# Altium PCB PCB.PcbDoc
Units mm, origin at the board's own origin, x right, y up, seen from the top; angles counter-clockwise.
Board outline 30.25 x 32.75 mm, 2 copper layers (Top Layer, Bottom Layer), stack 1.58 mm thick; 9 components, 8 nets, 49 pads, 5 vias.
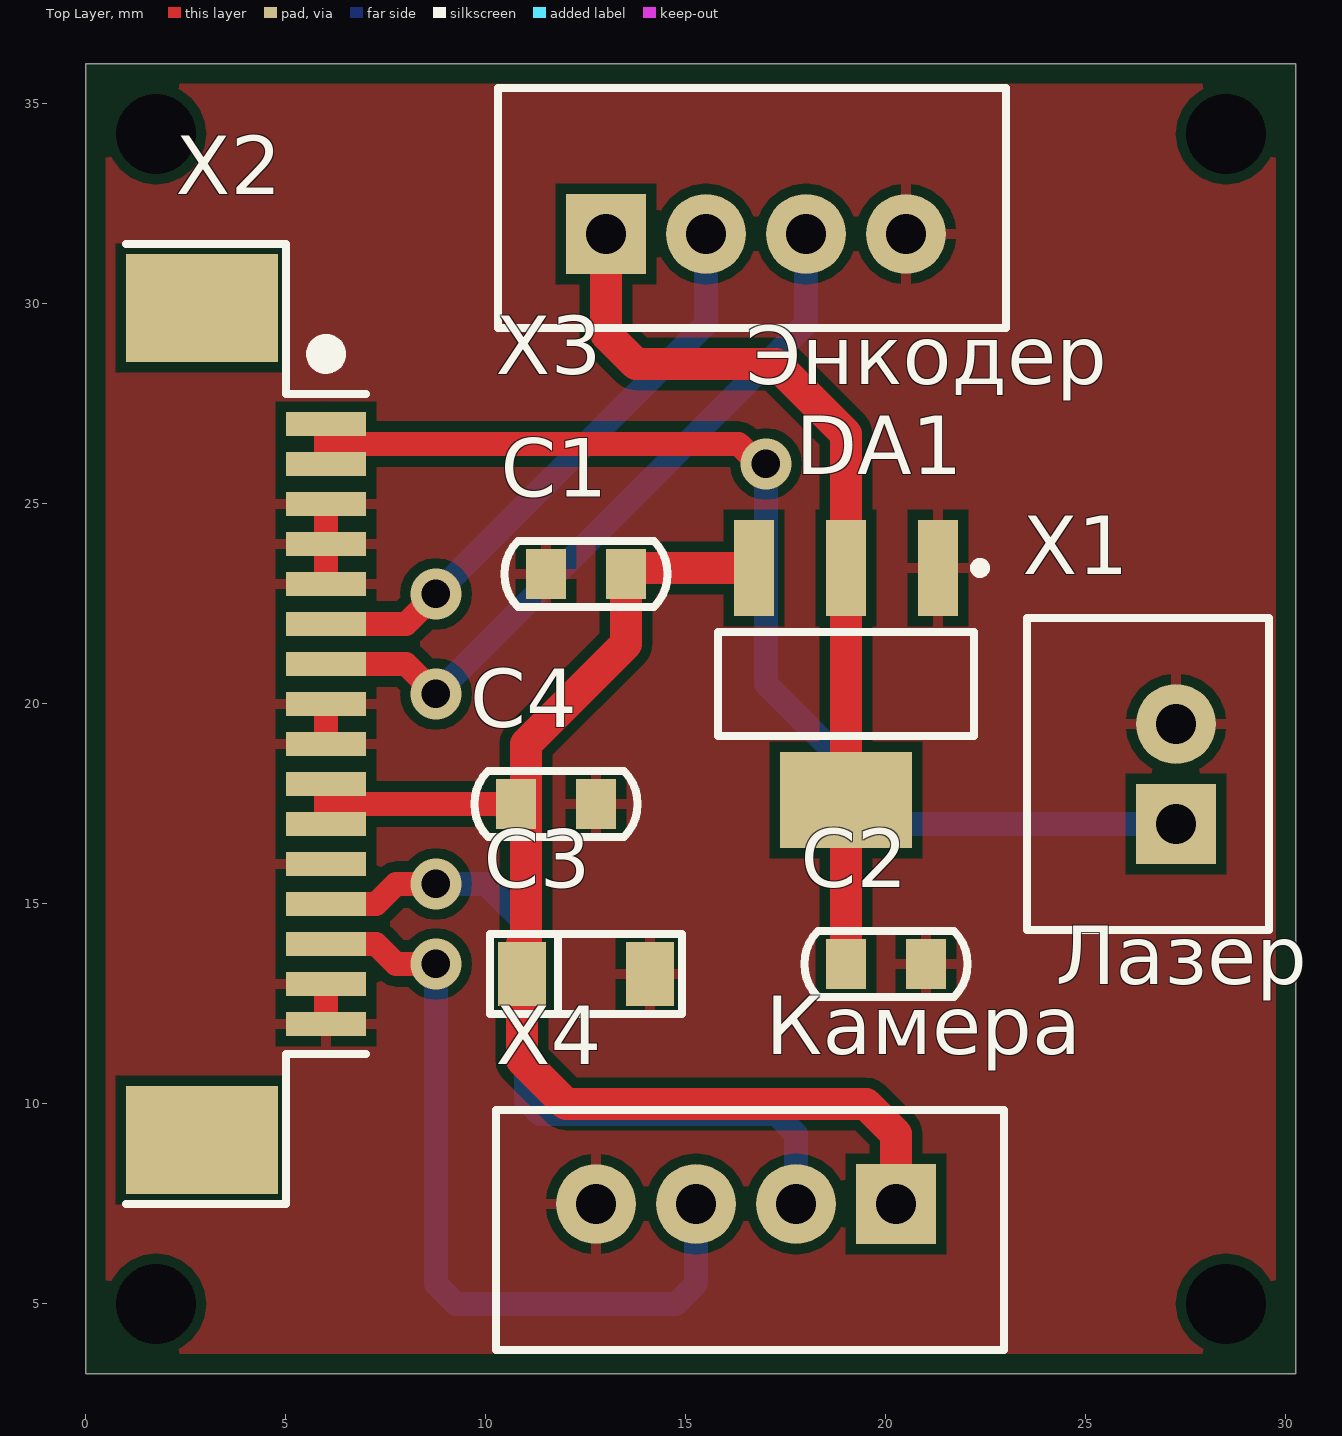
[diagram p0: Top Layer view]
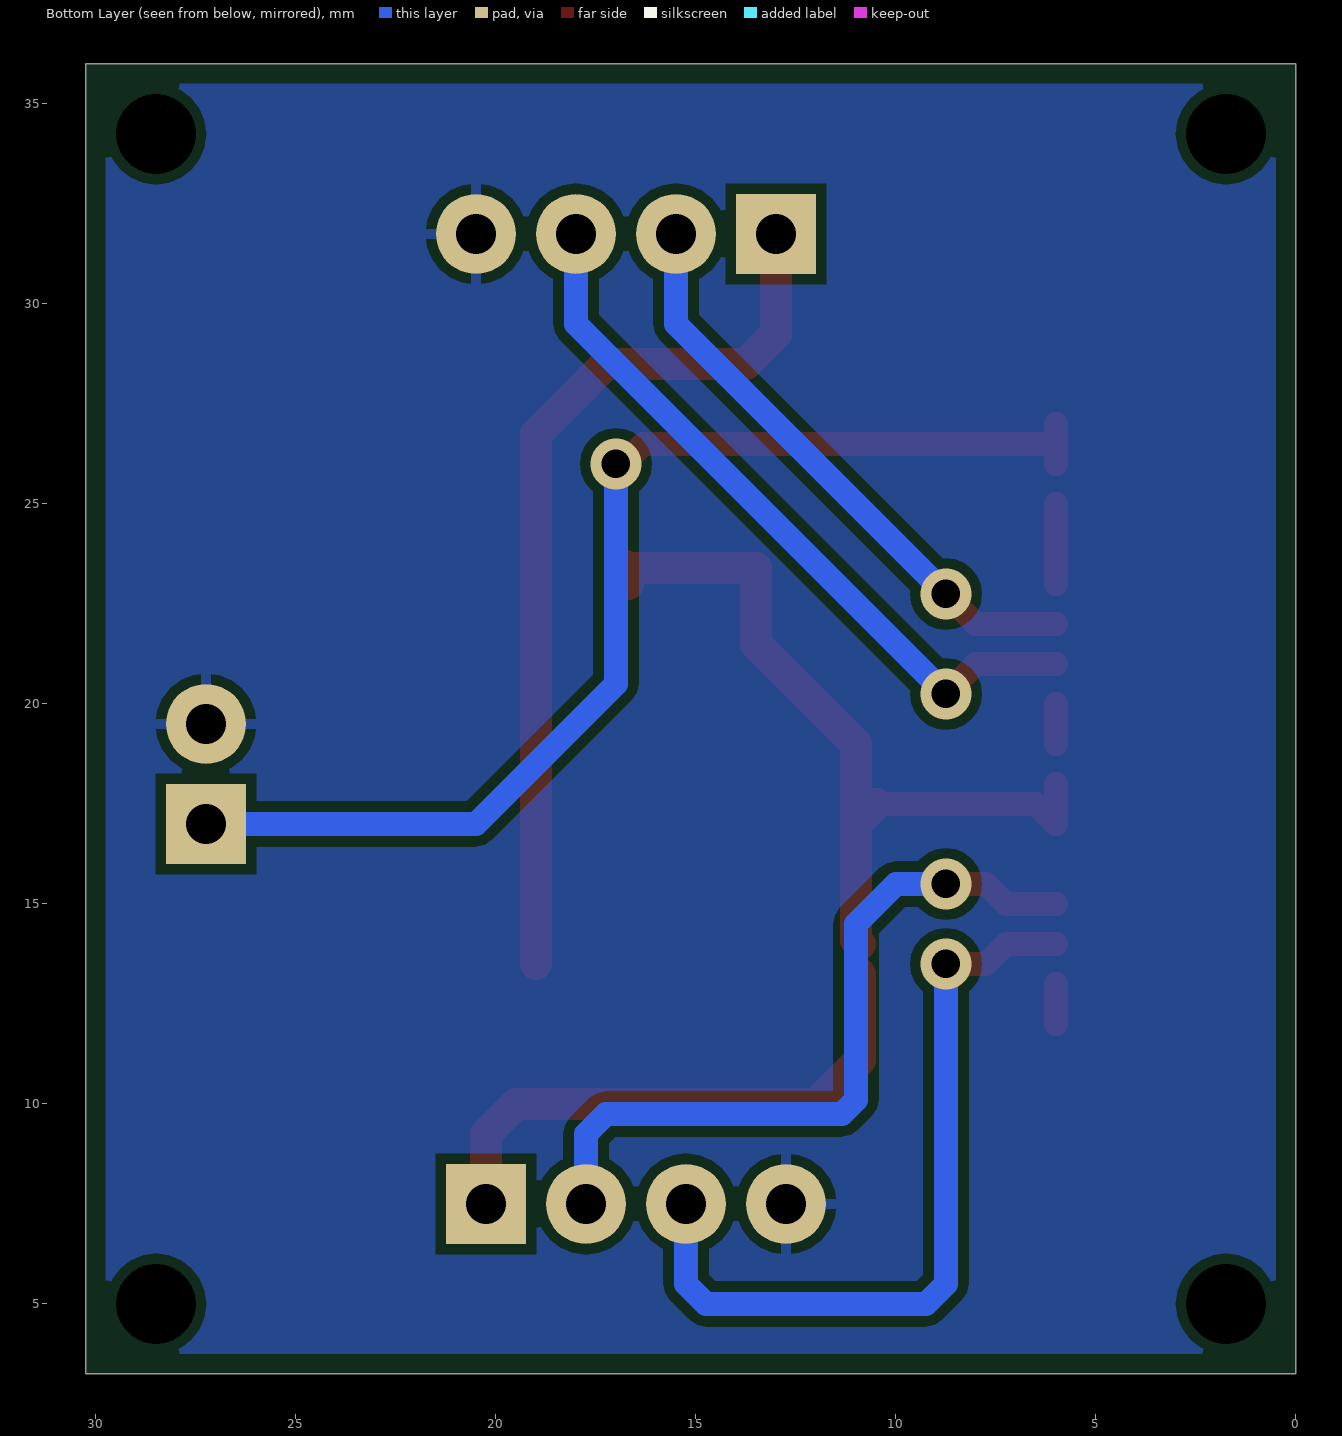
[diagram p1: Bottom Layer view, seen from below]
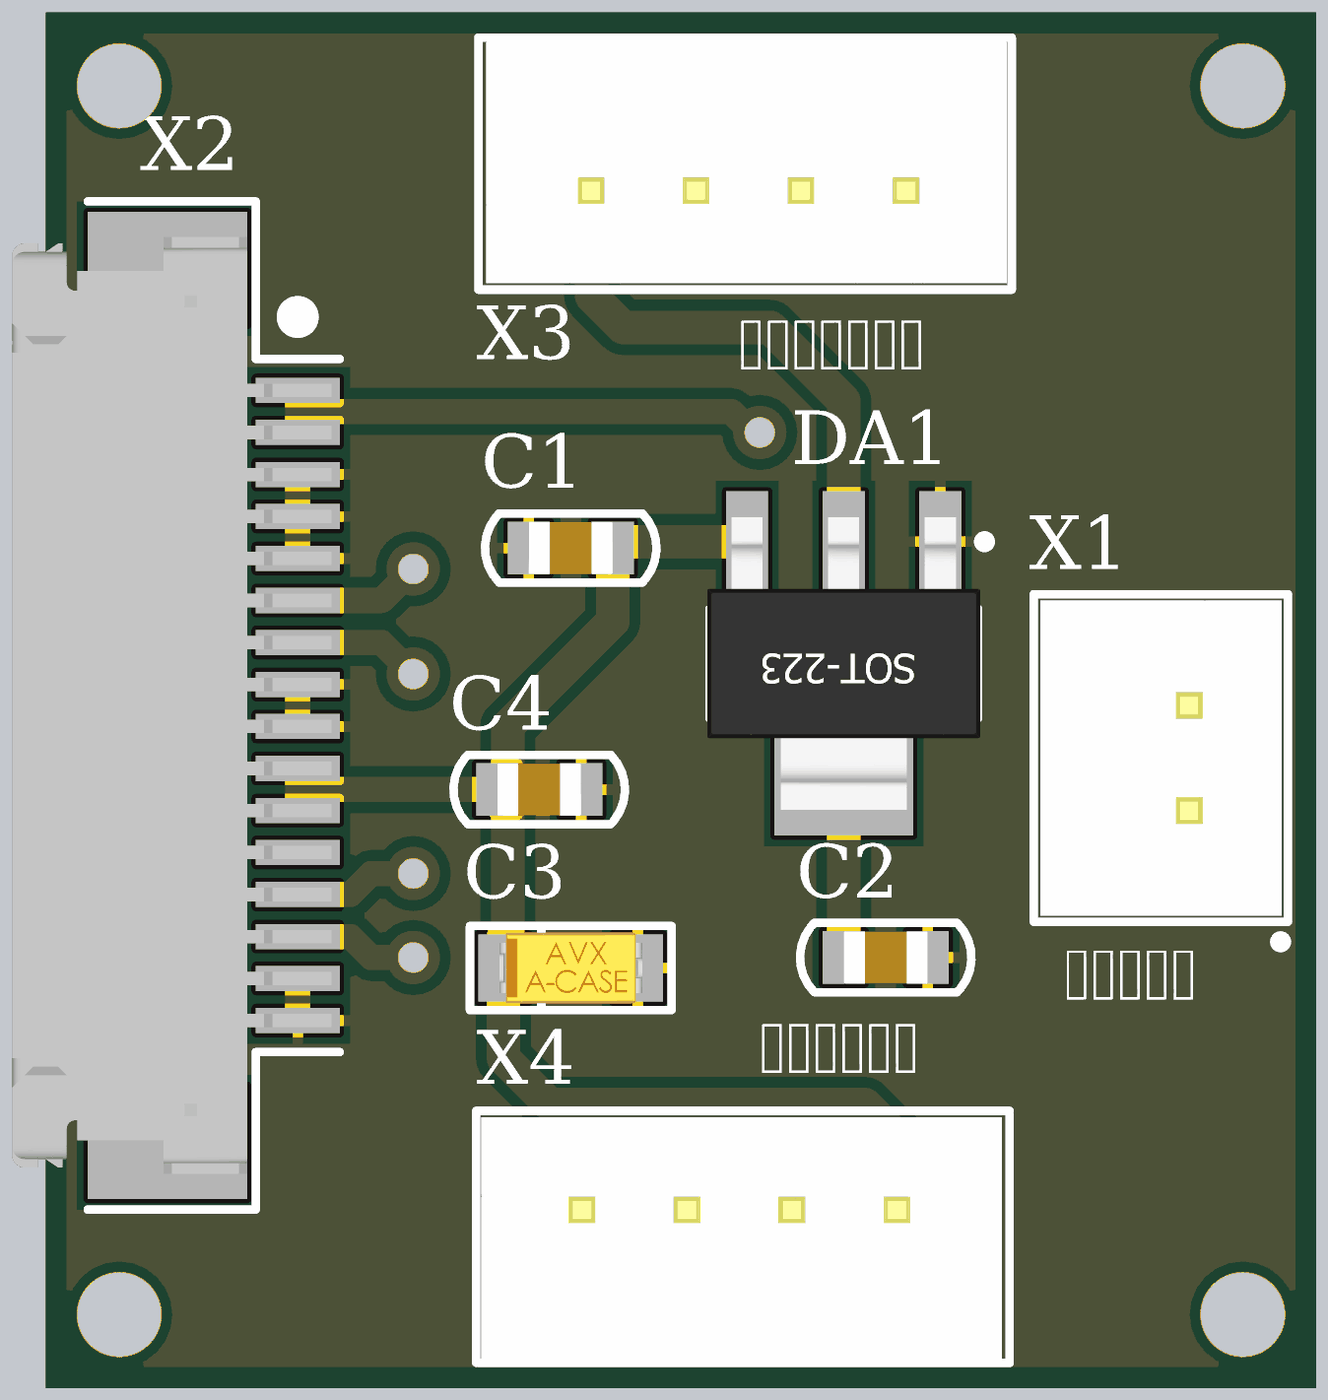
[diagram p2: 3D render of the assembled board from above, using the file's embedded part models]

## Layer stack, top to bottom
Top Solder: solder mask 0.0102, Solder Resist, Dk 3.5
Top Layer: signal copper 0.0356
Dielectric 1: dielectric 1.509, FR-4, Dk 4.8
Bottom Layer: signal copper 0.0356
Bottom Solder: solder mask 0.0102, Solder Resist, Dk 3.5

## Board outline
0,3.25 0,36 30.25,36 30.25,3.25

## Design rules (kind name [scope] priority, off if disabled: settings)
Clearance [All] p1: gap=0.254 ignorepadtopadclearanceinfootprint=FALSE except(0: Arc-Hole Track-Hole SMDPad-Hole THPad-Hole Via-Hole Fill-Hole Poly-Hole Region-Hole Text-Hole)
PolygonConnect [All] p1: connectstyle=Relief reliefconductorwidth=0.254 reliefentries=4 polygonreliefangle="90 Angle" airgapwidth=0.254
RoutingVias [All] p1: holewidth=0.711 width=1.27 viastyle="Through Hole" minholewidth=0.711 minwidth=1.27 maxholewidth=0.711 maxwidth=1.27
SolderMaskExpansion [All] p1: expansion=0.102
Width [All] p1: maxlimit=5 minlimit=0.2 preferedwidth=0.3
30 further rules are at their usual default settings.

## Components (designator, comment, footprint, x,y, rotation, side; value= is the part's Value field where it differs from the comment)
C1 "Ceramic capacitor, 0.1 мкФ, X7R, ±10%, 16В, 0805, -55...+125°C" "CAP: 0805" 12.5,23.25 r0 top value="0.1 мкФ"
C2 "Ceramic capacitor, 0.1 мкФ, X7R, ±10%, 16В, 0805, -55...+125°C" "CAP: 0805" 20,13.5 r180 top value="0.1 мкФ"
C3 "Tantalum capacitor, 100мкФ, 6.3В, ±10%, 2Ohm, case A (3216), -55...+125°C" "CAP: TANTAL-A" 12.5,13.25 r0 top value=100мкФ
C4 "Ceramic capacitor, 0.1 мкФ, X7R, ±10%, 16В, 0805, -55...+125°C" "CAP: 0805" 11.75,17.5 r180 top value="0.1 мкФ"
DA1 "AMS1117-3.3" "SOT223 AMS1117" 19,20.5 r270 top
X1 "Лазер" "CON: CWF-2" 27.25,18.25 r90 top
X2 "\"Разъем\"" "CON: 52207-1633, FFC / FPC" 6,27 r270 top
X3 "Энкодер" "CON: CWF-4" 16.75,31.75 r0 top
X4 "Камера" "CON: CWF-4" 16.5,7.5 r180 top

## Footprints (in the part's own frame and the unit in brackets; to place one, negate y for a bottom-side part, rotate by r counter-clockwise, add the part's x,y. Pads: shape width x height; smd on the part's side, far side on the other; paste and mask are expansions set on the pad)
"CAP: 0805" [mm]
  rect 1x1.25 smd: 1(-1,0) 2(1,0)
  silkscreen extent -2.04,-0.82 2.04,0.82, body extent -1,-0.62 1,0.63, height 1
"CAP: TANTAL-A" [mm]
  rect 1.2x1.6 smd: 1(-1.6,0) 2(1.6,0)
  silkscreen extent -2.4,-1 2.4,1, body extent -1.7,-0.84 1.7,0.84, height 1.71
"CON: 52207-1633, FFC / FPC" [mm]
  rect 2.7x3.8 smd: 0(-2.9,-3.1) 0(17.9,-3.1)
  rect 0.6x2 smd: 1(0,0) 2(1,0) 3(2,0) 4(3,0) 5(4,0) 6(5,0) 7(6,0) 8(7,0) 9(8,0) 10(9,0) 11(10,0) 12(11,0) 13(12,0) 14(13,0) 15(14,0) 16(15,0)
  silkscreen extent -4.5,-5 19.5,1, body extent -3.65,-6.8 18.65,0.8, height 2.75
"CON: CWF-2" [mm]
  rect 2x2 hole 1: 1(-1.25,0)
  round 2 hole 1: 2(1.25,0)
  round 0.5 on Top Overlay: ""(-4.375,-2.15)
  round 0.5 on Mech1: ""(-3.2,-1.7)
  silkscreen extent -3.9,-2.32 3.9,3.72, body extent -3.75,-2.18 3.75,3.57, height 7
"CON: CWF-4" [mm]
  rect 2x2 hole 1: 1(-3.75,0)
  round 2 hole 1: 2(-1.25,0) 3(1.25,0) 4(3.75,0)
  round 0.5 on Mech1: ""(-5.9,-1.8)
  silkscreen extent -6.45,-2.35 6.25,3.65, body extent -6.27,-2.19 6.13,3.56, height 7
"SOT223 AMS1117" [mm] "SOT223, 4-Leads, Body 6,50x7,00mm (avg), Pitch 2,30mm, IPC Medium Density"
  rect 2.4x1 smd: 1(-2.9,2.3) 2(-2.9,0) 3(-2.9,-2.3)
  rect 2.4x3.3 smd: 2(2.9,0)
  round 0.5 on Mech1: ""(-3,2.7)
  silkscreen extent -3.02,-3.2 1.3,3.48, body extent -3.48,-3.25 3.48,3.25, height 1.65

## Part data
C1 C2 C4: library part Ceramic_0805, Manufacturer=Yageo, Package=0805, PartNumber=CC0805KRX7R7BB104, Temperature=-55...+125°C, Tolerance=±10%, TypeCapacitor="Ceramic capacitor", TypeDielectric=X7R, Voltage=16В, HelpURL=https://www.digikey.com/product-detail/en/yageo/CC0805KRX7R7BB104/311-1142-1-ND/303052, ValueManufacturerPartNumber="Ceramic capacitor, 0.1 мкФ, X7R, ±10%, 16В, 0805, -55...+125°C"
C3: library part Tantal_A, Manufacturer=AVX, Package="case A (3216)", PartNumber=F930J107KAAAJ6, Temperature=-55...+125°C, Tolerance=±10%, TypeCapacitor="Tantalum capacitor", TypeDielectric=X7R, Voltage=6.3В, HelpURL=https://www.digikey.com/product-detail/en/avx-corporation/F930J107KAAAJ6/478-12404-1-ND/9645231, Impedance=2Ohm, ValueManufacturerPartNumber="Tantalum capacitor, 100мкФ, 6.3В, ±10%, 2Ohm, case A (3216), -55...+125°C"
DA1: library part AMS1117
X1: library part CWF-2R(CWF-2), CurrentMax=3A, Manufacturer=Connfly, PartNumber=CWF-2R, ValueManufacturerPartNumber="Connector, 2pin, 2.54mm, 250VAC, 3A", VoltageMax=250VAC, CommentText="\"Лазер\"", HelpURL=https://www.chipdip.ru/product/cwf-2r-ds1069-2-mr, Multichannel=2pin, Pin1=Лазер, Pin2=GND, Pitch=2.54mm, TypeConnector=Connector
X2: library part "52207-1633, FFC / FPC", Pin_1=Лазер, Pin_2=Лазер, Pin_3=GND, Pin_4=GND, Pin_5=GND, Pin_6="Энкодер 1", Pin_7="Энкодер 2", Pin_8=GND, Pin_9=GND, Pin_10=+5В, Pin_11=+5В, Pin_12=GND, Pin_13="Камера D-", Pin_14="Камера D+", Pin_15=GND, Pin_16=GND
X3 X4: library part CWF-4R(CWF-4), CurrentMax=3A, Manufacturer=Connfly, PartNumber=CWF-4R, ValueManufacturerPartNumber="Connector, 4pin, 2.54mm, 250VAC, 3A", VoltageMax=250VAC, HelpURL=https://www.chipdip.ru/product/cwf-4r-ds1069-4-mr, Multichannel=4pin, Pin4=GND, Pitch=2.54mm, TypeConnector=Connector
  X3: CommentText="\"Энкодер\"", Pin1=+3.3В, Pin2="Энкодер 1", Pin3="Энкодер 2"
  X4: CommentText="\"Камера\"", Pin1=+5В, Pin2="Камера D-", Pin3="Камера D+"

## Free pads (board coordinates)
  round 0 hole 2: 2(28.5,34.25) 3(1.75,34.25) 4(1.75,5) 5(28.5,5)

## Via types
v1: diameter 1.27, hole 0.711, Top Layer to Bottom Layer, tented both sides, 5 vias

## Nets (pads, with @x,y where several pads share a name; then routed paths per layer and width w, separated by ;. In a path a pad name is that pad's centre, name@x,y a point inside that pad or via, vN(x,y) a via of type N, cw(c..) or ccw(c..) an arc to the next point about the centre after c; other vN are vias at no path point)
+3.3V: C2.2 DA1.2 X3.1 | length 22.8
  Top Layer w0.8: X3.1 13,29.25 13.75,28.5 17.25,28.5 19,26.75 19,23.4 19,17.6 C2.2
+5V: C1.2 C3.1 C4.2 DA1.3 X2.10 X2.11 X4.1 | length 34.6
  Top Layer w0.6: X2.10 X2.11 6.5,17.5 C4.2@10.5,17.5
  Top Layer w0.8: C4.2@10.5,17.5 C4.2@11,17 ; C3.1 10.9,11.1 12,10 19.5,10 20.25,9.25 X4.1 ; C3.1@10.9,14 11,14.1 C4.2@11,17 ; DA1.3@16.7,23 DA1.3 ; DA1.3@16.75,23.45 DA1.3 ; C4.2@11,17 11,19 13.5,21.5 13.5,23.4 DA1.3
GND: C1.1 C2.1 C3.2 C4.1 DA1.1 X1.2 X2.3 X2.4 X2.5 X2.8 X2.9 X2.12 X2.15 X2.16 X3.4 X4.4 | length 4
  Top Layer w0.6: X2.16 X2.15 ; X2.9 X2.8 ; X2.5 X2.4 X2.3
NetX1_1: X1.1 X2.1 X2.2 | length 29.4
  Top Layer w0.6: X2.2 6,26.5 ; X2.1 6,26.5 ; v1(17,26) 16.819,26 16.319,26.5 6,26.5
  Bottom Layer w0.6: v1(17,26) 17,20.5 20.5,17 X1.1
NetX2_6: X2.6 X3.2 | length 14.9
  Top Layer w0.6: X2.6 8,22 v1(8.75,22.75)
  Bottom Layer w0.6: v1(8.75,22.75) 15.5,29.5 X3.2
NetX2_7: X2.7 X3.3 | length 18.4
  Top Layer w0.6: X2.7 8,21 v1(8.75,20.25)
  Bottom Layer w0.6: v1(8.75,20.25) 18,29.5 X3.3
NetX2_13: X2.13 X4.2 | length 18.9
  Top Layer w0.6: X2.13 7.25,15 7.75,15.5 v1(8.75,15.5)
  Bottom Layer w0.6: v1(8.75,15.5) 10,15.5 11,14.5 11,10.101 11.351,9.75 17.25,9.75 17.75,9.25 X4.2
NetX2_14: X2.14 X4.3 | length 19.9
  Top Layer w0.6: X2.14 7.25,14 7.75,13.5 v1(8.75,13.5)
  Bottom Layer w0.6: v1(8.75,13.5) 8.75,5.5 9.25,5 14.75,5 15.25,5.5 X4.3
pads on no net: DA1. X1. X2.0 X3. X4.

## Polygon pours and split planes (outlines as drawn)
GND on Bottom Layer "Top Layer-No Net" (solid, remove dead copper, pour order 0): 0.5,35.5 0.5,3.75 29.75,3.75 29.75,35.5
GND on Top Layer "Top Layer-No Net" (solid, remove dead copper, pour order 2): 0.5,35.5 29.75,35.5 29.75,3.75 0.5,3.75

## Silkscreen, mask and mechanical layers (free items; w line width, h text height)
Border:
  the board outline again, w0.2

## Dimensions
0,3.25 to 0,36 on Size
0,36 to 30.25,36 on Size